# EAGLE board koruzarpi (EAGLE 7.3.0)
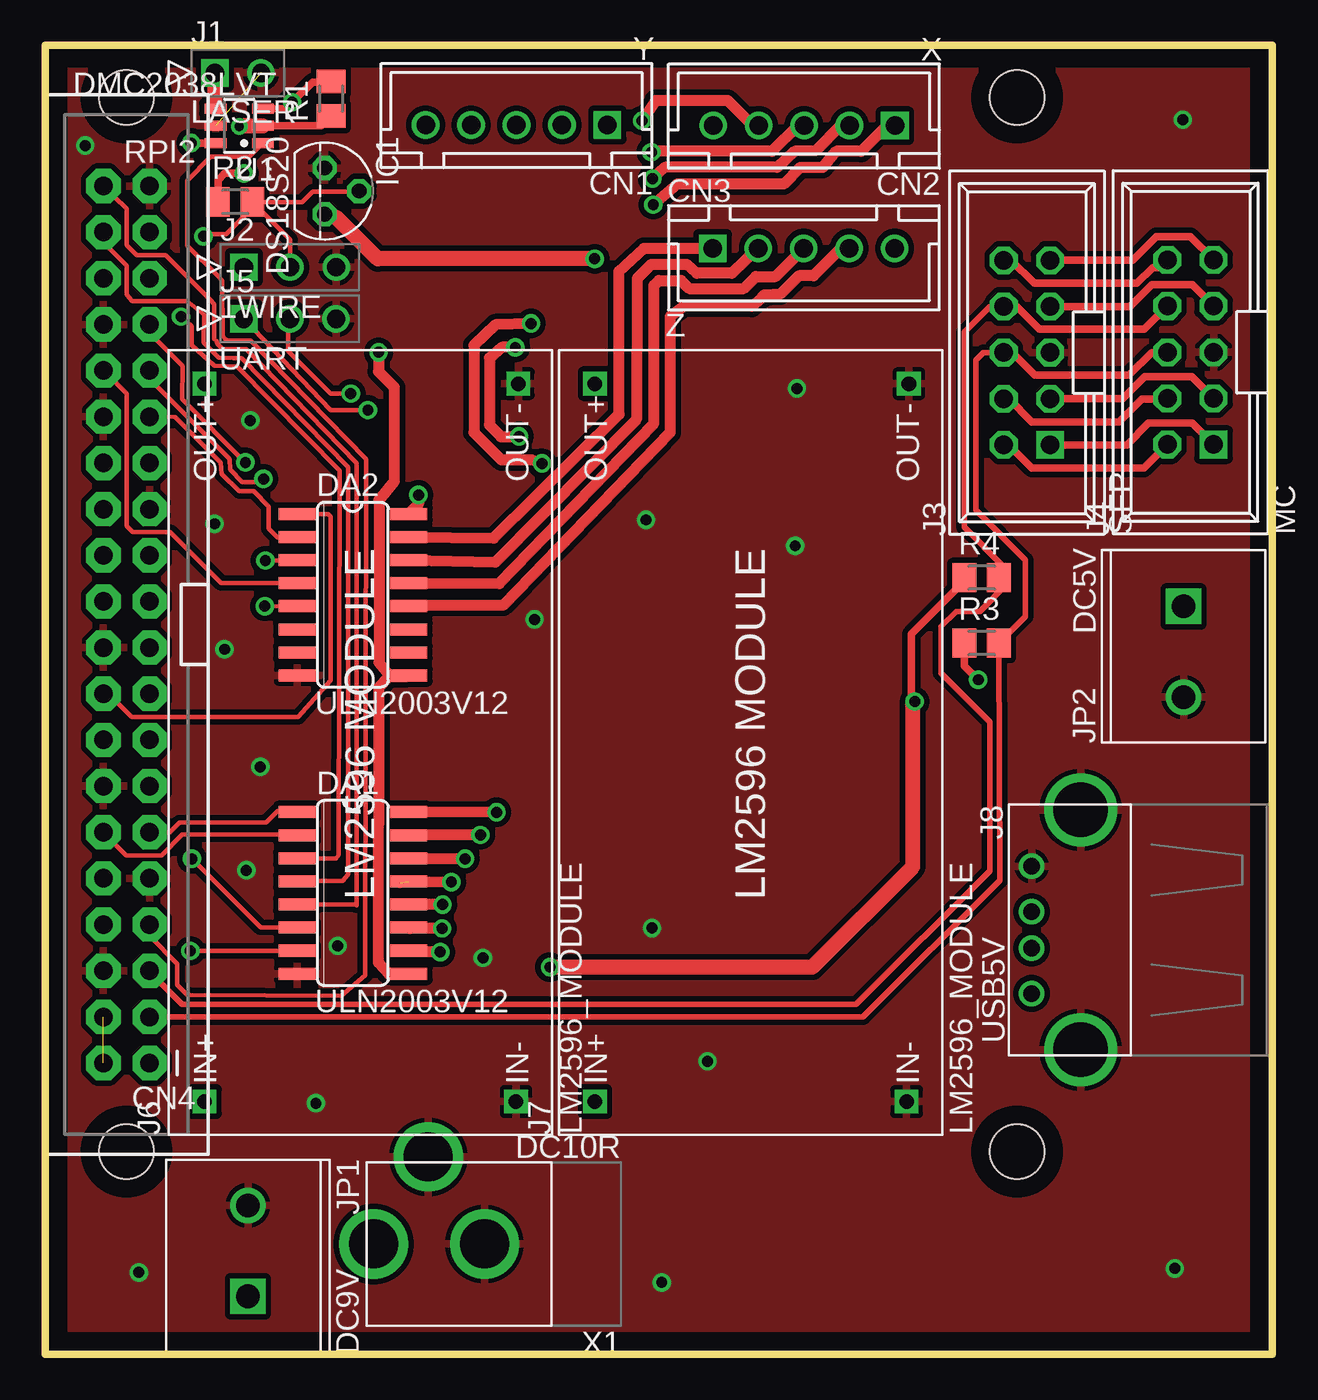
[diagram p0: board, top side]
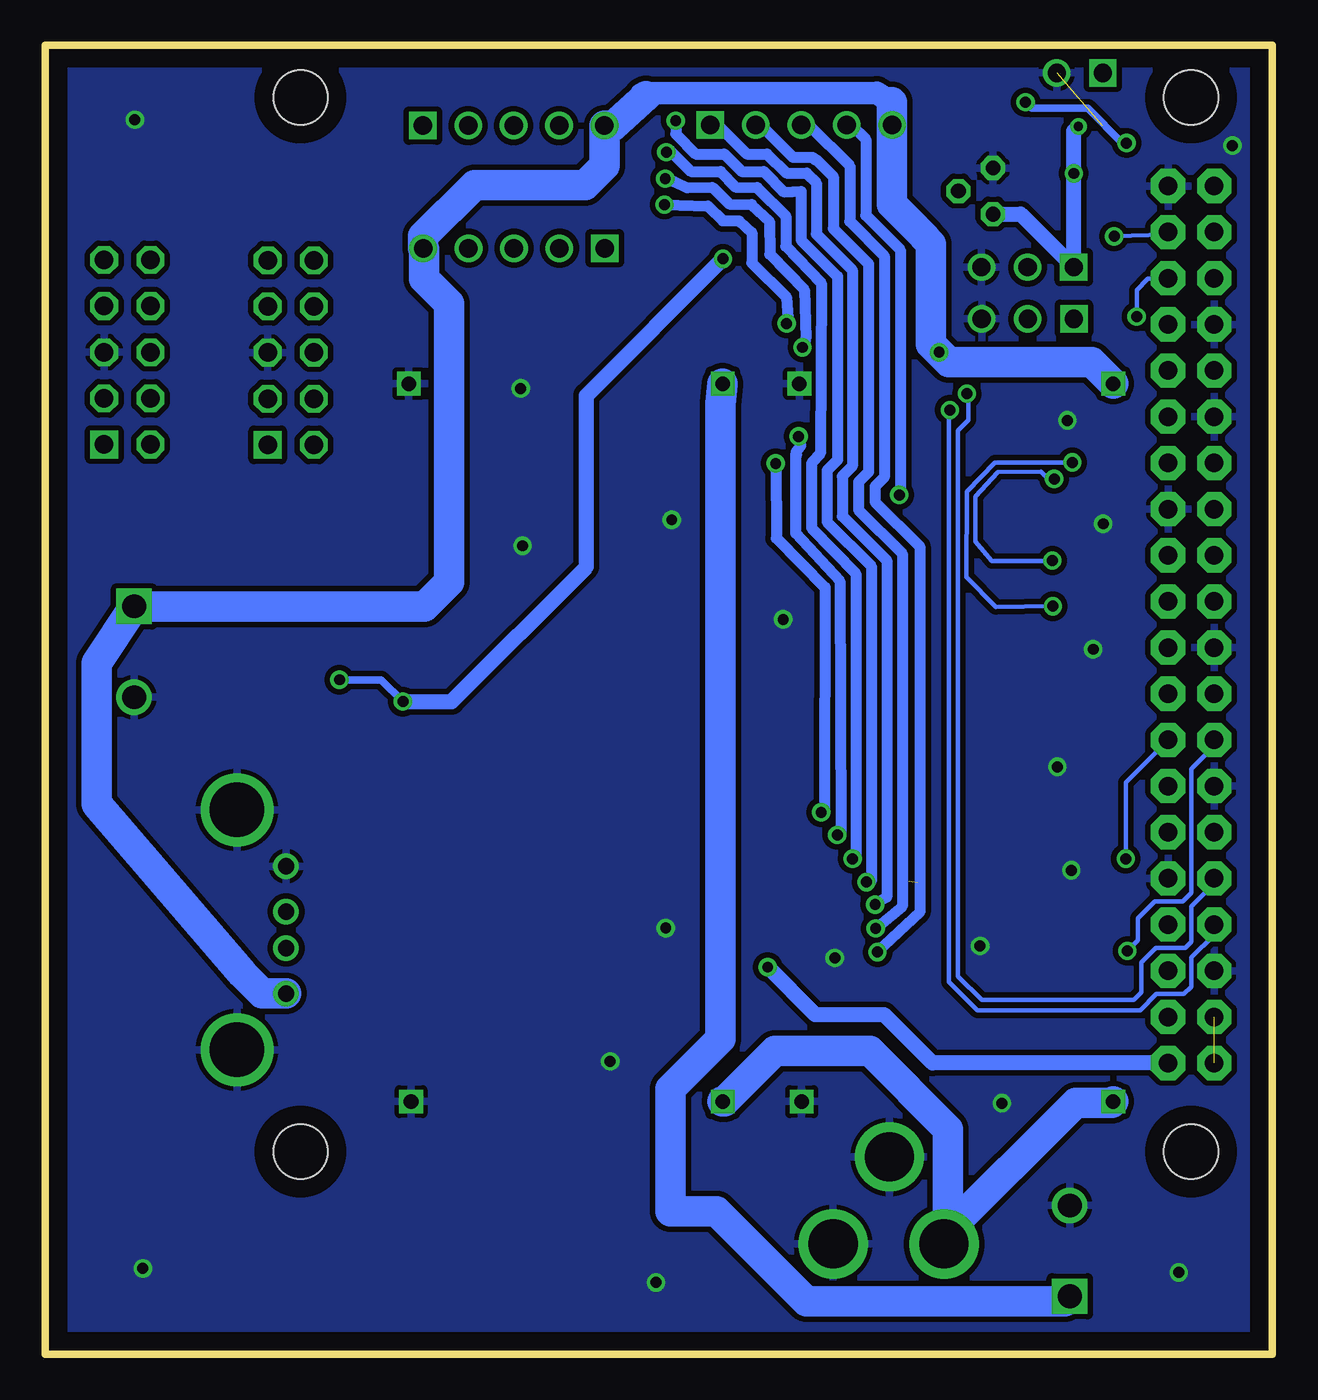
[diagram p1: board, bottom side, seen from below]

Size 67.5 x 72 mm. Coordinates in mm from the lower left corner, seen from the top.
Outline: 0,0 67.5,0 67.5,72 0,72 0,0
Copper layers (1*16): Top 0.035mm / dielectric 1.5mm / Bottom 0.035mm
Design rules "default": minimum track width 10mil, minimum drill 24mil, track to track 8mil, track to pad 8mil, pad to pad 8mil, via to via 8mil, smd to smd 8mil, copper to edge 40mil, drill to drill 8mil, minimum pad ring 10mil, minimum via ring 8mil, stop-mask expansion 4mil, vias tented up to drill 0mil, thermal gap 10mil

## Footprints (pad centres in the part's own frame; a part is rotated, then mirrored left to right if it is on the bottom)
B5B-XH-A = drill 1.016 square: 1 -5,0 | drill 1.016: 2 -2.5,0; 3 0,0; 4 2.5,0; 5 5,0
2X20-SHROUDED = drill 1.016 pad 1.88 octagon: 1 -1.27,24.13; 2 1.27,24.13; 3 -1.27,21.59; 4 1.27,21.59; 5 -1.27,19.05; 6 1.27,19.05; 7 -1.27,16.51; 8 1.27,16.51; 9 -1.27,13.97; 10 1.27,13.97; 11 -1.27,11.43; 12 1.27,11.43; 13 -1.27,8.89; 14 1.27,8.89; 15 -1.27,6.35; 16 1.27,6.35; 17 -1.27,3.81; 18 1.27,3.81; 19 -1.27,1.27; 20 1.27,1.27; 21 -1.27,-1.27; 22 1.27,-1.27; 23 -1.27,-3.81; 24 1.27,-3.81; 25 -1.27,-6.35; 26 1.27,-6.35; 27 -1.27,-8.89; 28 1.27,-8.89; 29 -1.27,-11.43; 30 1.27,-11.43; 31 -1.27,-13.97; 32 1.27,-13.97; 33 -1.27,-16.51; 34 1.27,-16.51; 35 -1.27,-19.05; 36 1.27,-19.05; 37 -1.27,-21.59; 38 1.27,-21.59; 39 -1.27,-24.13; 40 1.27,-24.13 | hole 3: 0,29; 0,-29; -49,-29; -49,29
SO16 = smd 2.032 x 0.66: 1 -6.883,5.715; 2 -6.883,4.445; 3 -6.883,3.175; 4 -6.883,1.905; 5 -6.883,0.635; 6 -6.883,-0.635; 7 -6.883,-1.905; 8 -6.883,-3.175; 9 -0.737,-3.175; 10 -0.737,-1.905; 11 -0.737,-0.635; 12 -0.737,0.635; 13 -0.737,1.905; 14 -0.737,3.175; 15 -0.737,4.445; 16 -0.737,5.715
TO92 = drill 0.813 octagon: 1 1.27,0; 2 0,1.905; 3 -1.27,0
HEADER-1X2-0.1 = drill 1 square: 1 -1.27,0 | drill 1: 2 1.27,0
HEADER-1X3-0.1 = drill 1 square: 1 -2.54,0 | drill 1: 2 0,0; 3 2.54,0
PINSHRD_PTH_2X05 = drill 1.016 square: 1 -5.08,-1.27 | drill 1.016 octagon: 2 -5.08,1.27; 3 -2.54,-1.27; 4 -2.54,1.27; 5 0,-1.27; 6 0,1.27; 7 2.54,-1.27; 8 2.54,1.27; 9 5.08,-1.27; 10 5.08,1.27
LM2596_MODULE = drill 0.8 square: 1 1.841,1.968; 2 1.841,19.113; 3 41.339,19.113; 4 41.339,1.841
USB-FEMALE-A-PTH = drill 0.9: D+ 5.9,1.3; D- 7.9,1.3; GND 3.4,1.3; VBUS 10.4,1.3 | drill 3: GND@1 13.5,4; GND@2 0.3,4
OSTTA020161 = drill 1.3 square: 1 -2.5,0 | drill 1.3: 2 2.5,0
M0805 = smd 1.3 x 1.6: 1 -0.95,0; 2 0.95,0
TSOT23-6 = smd 1.2 x 0.55: 1 -2.95,3; 2 -2.95,2.05; 3 -2.95,1.1; 4 -0.35,1.1; 5 -0.35,2.05; 6 -0.35,3
DC10R = drill 2.7 pad 3.81: 1 13.6,4.5; 2 10.6,-0.29; 3 7.5,4.5

## Placement (x,y rotation side)
CN1  Y  [B5B-XH-A]  25.92,67.62 180 top
CN2  X  [B5B-XH-A]  41.74,67.59 180 top
CN3  Z  [B5B-XH-A]  41.72,60.84 0 top
CN4  RPI2  [2X20-SHROUDED]  4.46,40.14 180 top
DA1  ULN2003V12  [SO16]  20.72,24.1 0 top
DA2  ULN2003V12  [SO16]  20.72,40.51 0 top
IC1  DS18S20  [TO92]  15.36,63.99 270 top
J1  LASER  [HEADER-1X2-0.1]  10.59,70.49 0 top
J2  1WIRE  [HEADER-1X3-0.1]  13.46,59.8 0 top
J3  SFP  [PINSHRD_PTH_2X05]  54,55.1 90 top
J4  MC  [PINSHRD_PTH_2X05]  63,55.12 90 top
J5  UART  [HEADER-1X3-0.1]  13.45,56.96 0 top
J6  LM2596_MODULE  [LM2596_MODULE]  27.86,12.05 90 top
J7  LM2596_MODULE  [LM2596_MODULE]  49.35,12.05 90 top
J8  USB5V  [USB-FEMALE-A-PTH]  52.96,30.24 270 top
JP1  DC9V  [OSTTA020161]  11.14,5.68 90 top
JP2  DC5V  [OSTTA020161]  62.62,38.64 270 top
R1  47k  [M0805]  15.71,69.07 90 top
R2  4.7k  [M0805]  10.44,63.39 0 top
R3  10k  [M0805]  51.51,39.12 0 top
R4  10k  [M0805]  51.51,42.72 0 top
U1  DMC2038LVT  [TSOT23-6]  9.01,69.63 180 top
X1  DC10R  [DC10R]  31.66,10.56 180 top

## Library data of the parts
CN1-CN3 = B5B-XH-A
CN4 = RASPBERRYPI-B+-GPIO
DA1 DA2 = ULN2003V12
IC1 = DS18S20
J1 = HEADER-1X2-0.1
J2 J5 = HEADER-1X3-0.1
J3 J4 = CON_HEADER_2X05
J6 J7 = LM2596_MODULE
J8 = USB-A-FEMALE-PTH
JP1 JP2 = 2-TERMINAL; DIGIKEYPART#: ED2561-ND; PART#: OSTTA020161
R1-R4 = resistor
U1 = DMC2038LVT
X1 = DC10-

## Nets
3.3V: CN4.17
5V: CN4.2 CN4.4
+5V: CN1.5 CN2.5 CN3.5 DA1.9 DA2.9 J6.3 J8.VBUS JP2.1
GND: CN4.6 CN4.9 CN4.14 CN4.20 CN4.25 CN4.30 CN4.34 CN4.39 DA1.8 DA2.8 IC1.3 J1.2 J2.3 J3.5 J4.5 J5.3 J6.1 J6.4 J7.1 J7.4 J8.GND J8.GND@1 J8.GND@2 JP1.2 JP2.2 U1.5 X1.2 X1.3
N$1: J7.3 JP1.1
N$2: J6.2 J7.2 X1.1
N$3: CN4.11 DA1.1
N$4: CN4.12 DA1.2
N$5: CN4.35 DA1.3
N$6: CN4.38 DA1.4
N$7: CN4.40 DA1.5
N$8: CN4.15 DA1.6
N$9: CN4.16 DA1.7
N$10: CN4.18 DA2.1
N$11: CN4.29 DA2.2
N$12: CN4.31 DA2.3
N$13: CN4.32 DA2.4
N$14: CN4.33 DA2.5
N$15: J3.10 J4.10
N$16: CN4.5 J3.8 J4.8 R4.2
N$17: CN2.1 DA1.16
N$18: J3.9 J4.9
N$19: J3.7 J4.7
N$20: CN4.3 J3.6 J4.6 R3.2
N$21: J3.2 J4.2
N$22: J3.4 J4.4
N$23: CN2.2 DA1.15
N$24: J3.3 J4.3
N$25: CN4.8 J5.1
N$26: CN4.10 J5.2
N$27: CN2.3 DA1.14
N$28: CN2.4 DA1.13
N$29: CN4.7 U1.1
N$30: CN4.1 IC1.1 J2.1 R1.1 R2.1 R3.1 R4.1 U1.2
N$31: CN4.37 IC1.2 J2.2 R2.2
N$32: J1.1 U1.4
N$33: R1.2 U1.3 U1.6
N$34: CN1.1 DA1.12
N$35: CN1.2 DA1.11
N$36: CN1.3 DA1.10
N$37: CN3.1 DA2.15
N$38: CN1.4 DA2.16
N$39: CN3.2 DA2.14
N$40: CN3.3 DA2.13
N$41: CN3.4 DA2.12
SFP: J3.1 J4.1

## Tracks (layer width: path | path; a pad name or v marks a point on that pad's centre or on a via)
5V  (1 unrouted)
+5V  (via drill 0.6 pad 0.61)
  Top 0.406: DA1.9
  Top 0.61: v18.33,55.12 18.33,54.06 19.19,53.2 19.19,48.01 18.35,46.99 18.35,38.05 19,37.29 | 19,37.29 19.94,37.29 DA2.9 | 19,37.29 18.89,37.29 18.33,36.66 18.31,21.54 18.89,20.91 19.97,20.91 DA1.9
  Bottom 1.27: 34.45,69.22 34.72,69.29 34.15,69.37 21.77,69.39 20.92,68.88
  Bottom 1.676: 36.72,67.57 CN2.5 | J8.VBUS 55.58,19.84 56.63,20.89 56.63,20.9 64.67,30.27 64.67,38.01 JP2.1 46.65,41.12 45.28,42.49 45.28,57.79 46.67,59.18 46.67,60.79 CN3.5 46.71,61.5 43.89,64.32 37.81,64.32 36.74,65.39 CN2.5 | CN2.5 36.24,67.59 34.45,69.22 | 20.92,68.88 CN1.5 20.92,63.27 19.13,61.48 19.13,61.44 18.77,61.08 18.77,55.56 v18.33,55.12 17.79,54.58 9.94,54.58 J6.3
GND  (via drill 0.6 pad 0.61)  (1 unrouted)
  other vias: 2.19,66.49 62.58,67.91 62.14,4.71 5.14,4.49 11.05,26.62 11.82,32.31 11.27,51.37 14.88,13.8 16.08,22.46 9.85,38.78 9.3,45.68 33.91,3.94 36.43,16.1 33.37,23.44 33.04,45.9 41.25,44.47 41.35,53.13 26.91,40.42 24.07,21.8
  pour Bottom (isolate 0.305): 0.08,72.05 0.22,0.22 67.28,0.22 67.28,71.86 0.27,71.97
  pour Top (isolate 0.305): 0.22,71.75 0.11,71.75 0.11,0.11 67.28,0.11 67.28,0.44 67.17,0.44 67.17,71.86 0.56,71.78
N$1
  Bottom 1.676: 11.14,3.1 JP1.1 11.42,2.9 25.64,2.9 30.59,7.85 33.12,7.85 33.12,14.59 30.36,17.35 30.36,52.26 J7.3
N$2
  Bottom 1.676: J6.2 8.82,13.82 10.82,13.82 18.06,6.58 X1.1 17.84,6.28 17.84,12.37 22.14,16.67 27.37,16.67 30.15,13.89 J7.2
N$3
  Top 0.254: CN4.11 6.84,28.71 7.39,29.26 12.14,29.26 12.77,29.89 13.76,29.89 DA1.1
N$4
  Top 0.254: CN4.12 4.43,27.44 6.4,27.44 7.53,28.59 13.79,28.59 DA1.2
N$5  (via drill 0.6 pad 0.61)
  Top 0.254: DA1.3 16,27.27 16.14,27.45 16.18,48.6 10.56,54.34 9.27,54.38 8.05,55.52 8.05,56.57 v7.46,57.08
  Bottom 0.254: v7.46,57.08 7.46,58.54 6.84,59.16 5.76,59.16 CN4.35
N$6
  Top 0.254: CN4.38 3.19,61.17 4.46,59.88 4.46,58.28 4.78,57.92 7.81,57.92 8.72,57.18 8.71,55.66 9.52,54.83 10.33,54.81 10.74,54.79 10.8,54.81 16.66,48.79 16.64,26.39 16.35,26.04 13.87,26.04 DA1.4
N$7
  Top 0.254: DA1.5 17.07,24.73 17.11,24.69 17.13,49.02 11.04,55.3 9.75,55.3 9.46,55.59 9.46,55.64 9.41,55.69 9.41,55.74 9.28,55.85 9.28,57.78 9.06,58.02 6.61,60.46 5.03,60.46 4.46,61.01 4.46,63.02 CN4.40
N$8  (via drill 0.6 pad 0.61)
  Top 0.254: DA1.6 11.85,23.46 v8.06,27.25
  Bottom 0.254: v8.06,27.25 8.06,31.46 CN4.15
N$9  (via drill 0.6 pad 0.61)
  Top 0.254: v7.97,22.18 13.82,22.18 DA1.7
  Bottom 0.254: CN4.16 3.19,33.47 4.46,32.18 4.46,25.38 4.93,24.9 6.45,24.9 7.39,23.98 7.39,22.76 v7.97,22.18
N$10
  Top 0.254: CN4.18 3.63,36.33 3.63,36.17 4.74,35.06 13.89,35.06 15.68,37.06 15.68,46.09 15.55,46.23 DA2.1
N$11
  Top 0.254: CN4.29 7.13,51.56 9.65,49.05 9.69,48.43 10.65,47.47 11.45,47.47 12.28,46.64 12.28,45.43 12.78,44.93 13.81,44.93 DA2.2
N$12  (via drill 0.6 pad 0.61)
  Top 0.254: CN4.31 5.73,53.64 10.13,49.23 10.15,48.66 10.81,47.99 11.84,47.99 v12,48.15 | v12.1,43.66 13.81,43.66 DA2.3
  Bottom 0.254: v12,48.15 12.31,48.15 12.72,48.56 15.09,48.53 16.33,47.18 16.33,44.7 15.42,43.64 12.12,43.64 v12.1,43.66
N$13
  Top 0.254: DA2.4 9.68,42.41 6.87,45.22 4.79,45.22 4.46,45.55 4.46,52.84 CN4.32
N$14  (via drill 0.6 pad 0.61)
  Top 0.254: CN4.33 5.73,56.17 7.54,54.36 7.53,52.55 v11,49.06 | v12.07,41.15 13.81,41.12 DA2.5
  Bottom 0.254: v11,49.06 15.27,49.05 16.8,47.46 16.83,42.74 15.21,41.1 v12.07,41.15
N$15
  Top 0.406: J3.10 53.13,60.18 54.4,58.91 60.06,58.91 60.93,59.78 61.31,59.78 J4.10
N$16
  Top 0.305: J3.8 51.96,57.64 50.56,56.24 50.56,45.49 52.63,43.42 52.63,42.89 R4.2 52.76,42.42 52.96,42.42 51.4,40.86 50.12,40.86 49.28,40.02 49.28,37.46 51.96,34.78 51.96,26.59 44.6,19.23 7.53,19.23 5.73,21.03 CN4.5
  Top 0.406: J3.8 53.45,57.64 54.69,56.4 60.47,56.4 J4.8
N$17  (via drill 0.6 pad 0.61)
  Top 0.61: CN2.1 46.3,67.59 44.89,66.18 43.5,66.18 42.76,65.28 41.52,65.28 40.63,64.37 34.75,64.37 v33.44,63.24 | v26.72,56.7 24.76,56.63 23.57,55.5 23.57,50.7 25.07,49.21 26.77,49.21 v27.32,49 | v24.82,29.81 20.01,29.84 DA1.16
  Bottom 0.61: v33.44,63.24 31.05,63.17 30.23,62.35 29.33,62.35 28.64,61.7 28.64,60.03 26.74,58.16 26.65,56.97 v26.72,56.7 | v27.32,49 27.28,44.89 24.61,42.18 24.63,30.07 v24.82,29.81
N$18
  Top 0.406: J3.9 59.83,60.18 61.12,61.47 63,61.47 J4.9
N$19
  Top 0.406: J3.7 59.66,57.64 60.86,58.84 63.09,58.84 J4.7
N$20
  Top 0.305: J3.6 51.6,55.1 51.18,54.68 51.18,46.43 53.91,43.7 53.91,40.57 R3.2 52.52,26.05 44.98,18.55 CN4.3
  Top 0.406: J3.6 53.2,55.1 54.45,53.85 59.61,53.85 60.86,55.1 61.71,55.1 J4.6
N$21
  Top 0.406: J3.2 53,50.02 54.28,48.74 60.43,48.74 J4.2
N$22
  Top 0.406: J3.4 53.01,52.56 54.28,51.29 59.05,51.29 60.31,52.55 61.7,52.55 J4.4
N$23  (via drill 0.6 pad 0.61)
  Top 0.61: CN2.2 43.75,67.59 42.38,66.22 41.22,66.17 40.27,65.29 34.08,65.29 v33.4,64.67 | v25.85,55.39 25.11,55.39 24.43,54.8 24.43,51.12 25.06,50.47 v26.06,50.49 | v23.93,28.56 20,28.56 DA1.15
  Bottom 0.61: v33.4,64.67 32.9,64.5 32.2,64.17 30.81,64.19 29.87,63.27 28.65,63.25 27.67,62.33 27.65,60.51 25.74,58.56 25.66,55.88 v25.85,55.39 | v26.06,50.49 25.95,49.98 26.2,49.63 26.19,49.4 26.23,49.51 26.23,45.17 23.79,42.53 23.73,28.7 v23.93,28.56
N$24
  Top 0.406: J3.3 59.28,52.56 60.5,53.78 63.07,53.78 J4.3
N$25  (via drill 0.6 pad 0.61)
  Top 0.254: v17.74,51.94 15.69,51.94 J5.1
  Bottom 0.254: CN4.8 3.19,23.07 4.46,21.82 4.46,20.21 4.86,19.82 6.38,19.82 7.26,18.91 16.22,18.91 17.79,20.48 17.79,51.89 v17.74,51.94
N$26  (via drill 0.6 pad 0.61)
  Top 0.254: v16.8,52.84 15.68,52.84 13.35,55.17 13.35,56.8 J5.2
  Bottom 0.254: CN4.10 3.19,25.89 4.46,24.62 4.46,22.69 4.79,22.36 6.41,22.36 7.21,21.56 7.21,19.9 7.62,19.49 15.99,19.49 17.29,20.79 17.29,50.82 16.71,51.4 16.71,52.75 v16.8,52.84
N$27  (via drill 0.6 pad 0.61)
  Top 0.61: CN2.3 41.39,67.59 39.98,66.18 33.36,66.18 v33.34,66.13 | v23.09,27.25 20.01,27.25 DA1.14
  Bottom 0.61: v33.34,66.13 33.13,66.22 31.97,65.06 30.35,65.06 29.54,64.21 28.35,64.18 | 28.34,64.14 28.35,64.18 | 28.35,64.18 26.76,62.62 26.76,60.95 24.81,58.92 24.86,49.55 25.35,49.01 25.35,45.45 22.92,42.94 22.91,27.47 v23.09,27.25
N$28  (via drill 0.6 pad 0.61)  (1 unrouted)
  Top 0.61: CN2.4 38.92,67.59 37.54,68.97 33.56,68.97 v32.82,67.86 | v22.33,25.97 19.51,25.93 19.47,25.97
  Bottom 0.61: v32.82,67.86 32.82,67.12 31.73,66.03 30.15,66.03 29.18,65.06 27.98,65.06 26.86,63.94 25.93,63.97 25.93,61.29 23.92,59.29 23.92,49.19 24.5,48.61 24.5,45.79 22.06,43.35 22.06,26.01 v22.33,25.97
N$29
  Top 0.254: CN4.7 5.73,23 7.26,21.47 7.26,20.3 7.8,19.76 7.94,19.76 16.28,19.72 17.6,20.84 17.64,49.25 11.3,55.76 10.07,55.76 9.94,55.81 9.92,55.79 9.75,56.06 9.73,59.07 9.52,59.28 7.8,60.99 7.8,64.57 9.1,65.87 11.2,65.87 U1.1
N$30  (via drill 0.5 pad 0.41, 0.6 pad 0.61)
  Top 0.406: R2.1 9.49,64.58 9.87,64.96 v10.92,64.96 | U1.2 15.17,67.58 R1.1 | R3.1 50.56,37.86 v51.32,37.1 | R4.1 50.56,42.52 47.65,39.61 47.65,36.08 v47.83,35.9
  Top 0.813: v27.76,21.29 42.2,21.29 47.72,26.81 47.72,35.79 v47.83,35.9 | v30.22,60.26 18.28,60.26 16,62.54 15.54,62.54 IC1.1 | 9.47,63.37 R2.1 | v10.66,67.54 10.98,67.59 U1.2
  Bottom 0.406: v51.32,37.1 49.03,37.1 v47.83,35.9
  Bottom 0.813: CN4.1 18.69,16.01 21.35,18.67 25.14,18.67 v27.76,21.29 | v47.83,35.9 45.15,35.9 37.74,43.31 37.74,52.74 v30.22,60.26 | IC1.1 13.84,62.72 J2.1 v10.92,64.96 10.92,67.29 v10.66,67.54
N$31  (via drill 0.6 pad 0.61)
  Top 0.254: J2.2 13.46,61.32 R2.2 | R2.2 14.13,63.39 14.69,63.95 17.23,63.95 IC1.2 | R2.2 11.39,63.08 9.93,61.62 8.56,61.62 v8.7,61.5
  Bottom 0.254: v8.7,61.5 5.87,61.59 CN4.37
N$32
  Top 0.813: J1.1 9.32,68.57 U1.4
N$33  (via drill 0.6 pad 0.61)
  Top 0.406: U1.3 13.23,68.53 v13.57,68.88 14.69,69.99 15.68,69.99 R1.2 | U1.6 v8.02,66.63
  Bottom 0.406: v8.02,66.63 8.24,66.62 10.16,68.54 13.24,68.54 v13.57,68.88
N$34  (via drill 0.6 pad 0.61)
  Top 0.61: v21.85,24.73 DA1.12
  Bottom 0.61: CN1.1 30.5,67.62 28.91,66.03 27.79,66.03 26.74,64.98 25.62,64.98 25.08,64.44 25.08,61.62 23.1,59.64 23.1,48.85 23.65,48.3 23.65,46.1 21.21,43.66 21.21,25.15 v21.85,24.73
N$35  (via drill 0.6 pad 0.61)
  Top 0.61: v21.82,23.42 20.04,23.41 DA1.11
  Bottom 0.61: CN1.2 28.14,67.62 26.36,65.84 25.28,65.84 25.15,65.71 25.07,65.71 24.15,64.79 24.15,61.93 22.21,59.99 22.21,48.54 22.76,47.99 22.76,46.44 20.36,44.04 20.36,24.64 v21.82,23.42
N$36  (via drill 0.6 pad 0.61)
  Top 0.61: v21.72,22.12 20.05,22.13 DA1.10
  Bottom 0.61: CN1.3 25.49,67.62 23.25,65.38 23.25,62.32 21.35,60.42 21.35,48.24 21.85,47.74 21.85,46.88 19.4,44.43 19.4,24.3 v21.72,22.12
N$37
  Top 0.61: DA2.15 24.66,44.9 31.57,51.71 31.55,59.58 32.93,60.84 CN3.1
N$38  (via drill 0.6 pad 0.61)
  Top 0.61: v20.52,47.27 20.52,46.76 DA2.16
  Bottom 0.61: CN1.4 23.15,67.62 22.36,66.83 22.36,62.66 20.46,60.76 20.46,47.33 v20.52,47.27
N$39
  Top 0.61: CN3.2 39.2,60.84 37.77,59.46 35.83,59.46 35.29,59.95 33.32,59.95 32.55,59.18 32.52,51.42 24.74,43.56 20.01,43.66 DA2.14
N$40
  Top 0.61: DA2.13 24.96,42.38 33.48,51.2 33.48,58.79 33.75,59.06 34.98,59.06 35.41,58.63 38.43,58.63 39.09,59.29 40.17,59.29 CN3.3
N$41
  Top 0.61: CN3.4 43.77,60.84 42.26,59.33 41.45,59.33 40.44,58.32 39.54,58.27 39.43,58.16 39.56,58.23 38.86,57.65 35.14,57.65 34.37,57.09 34.37,50.7 25.17,41.19 20.02,41.18 DA2.12
SFP
  Top 0.406: J3.1 59.49,50.02 60.69,51.22 63.09,51.22 J4.1